# EAGLE board axiom_beta_power_board_v0.8_test (EAGLE 7.0.0), part 1 of 3
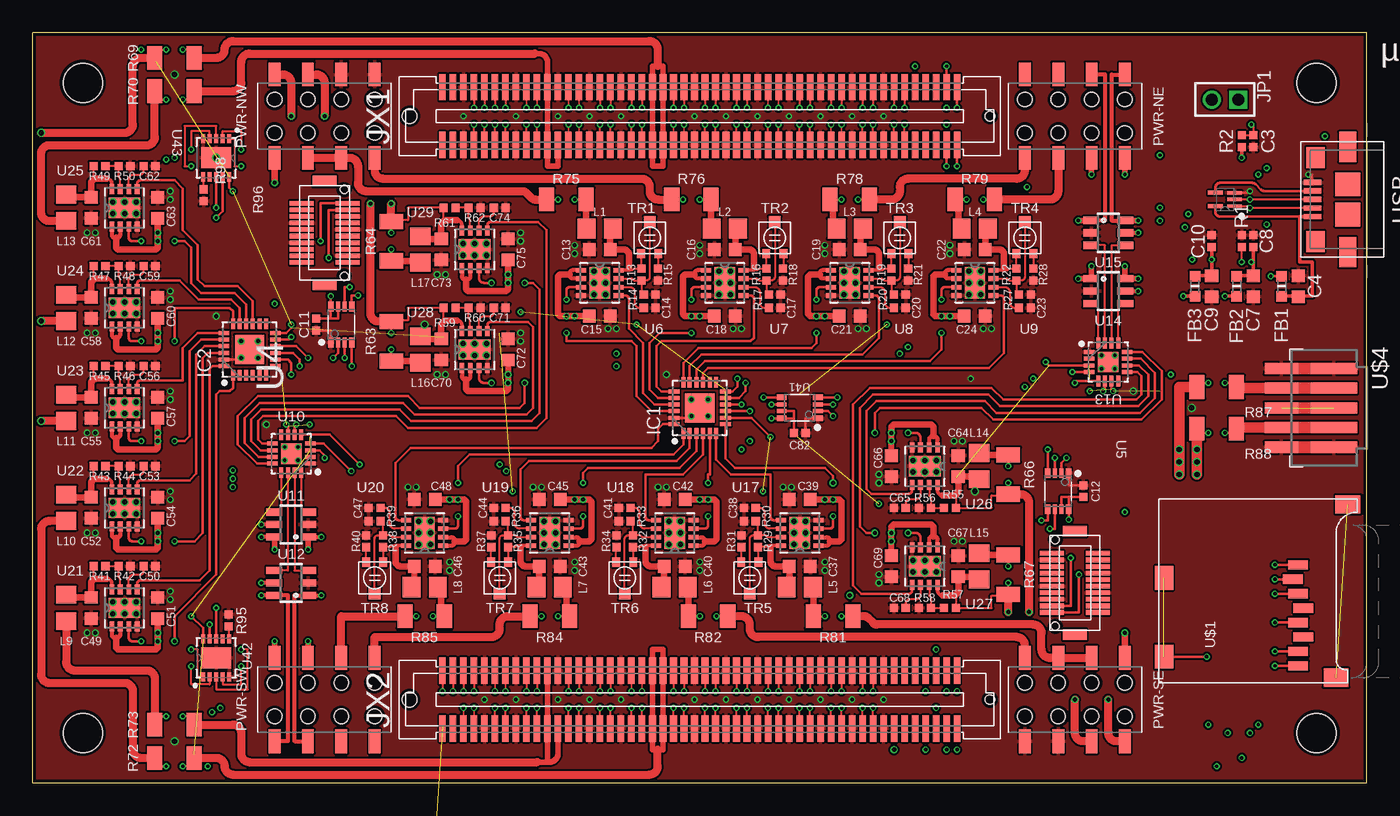
[diagram p0: board, top side]
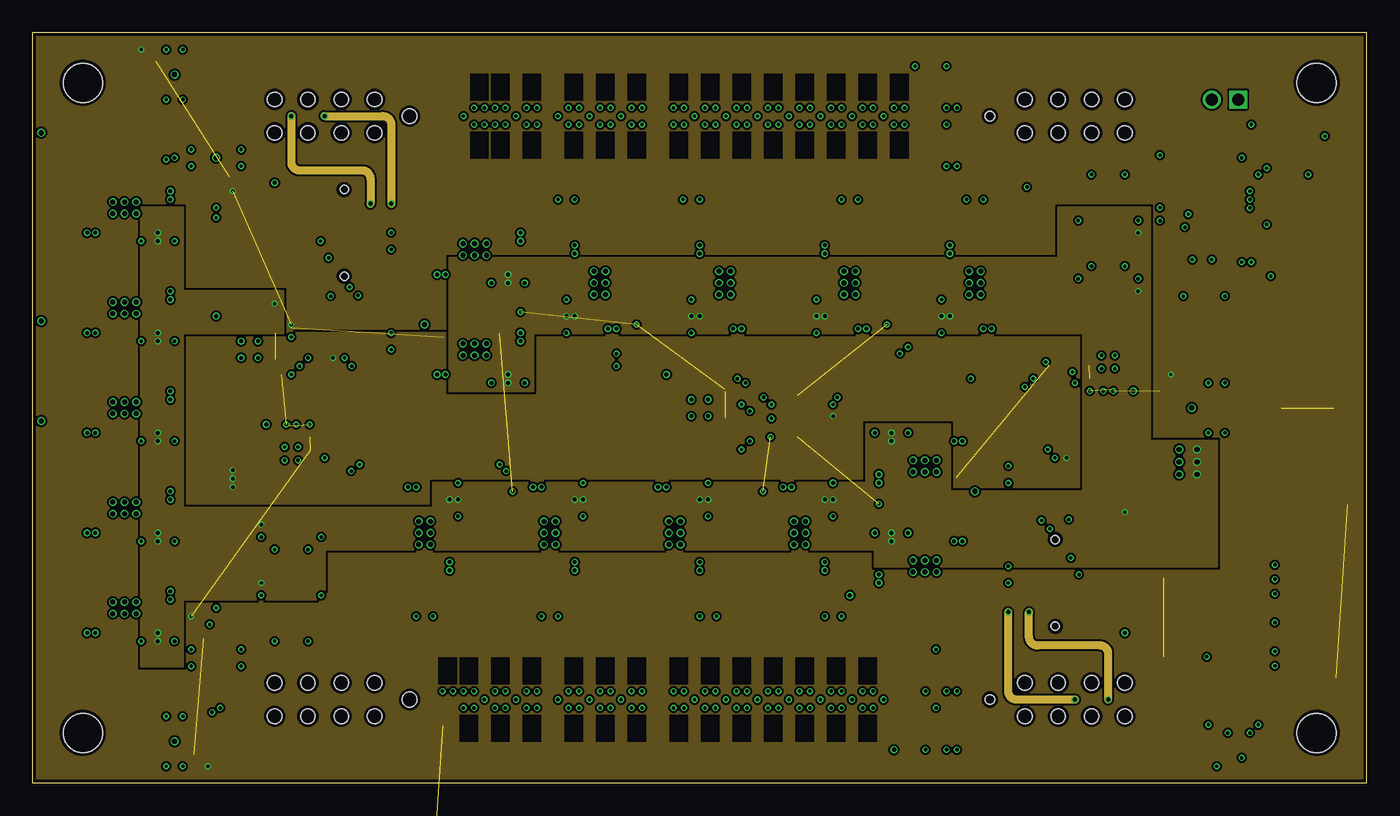
[diagram p1: board, inner layer Route2]
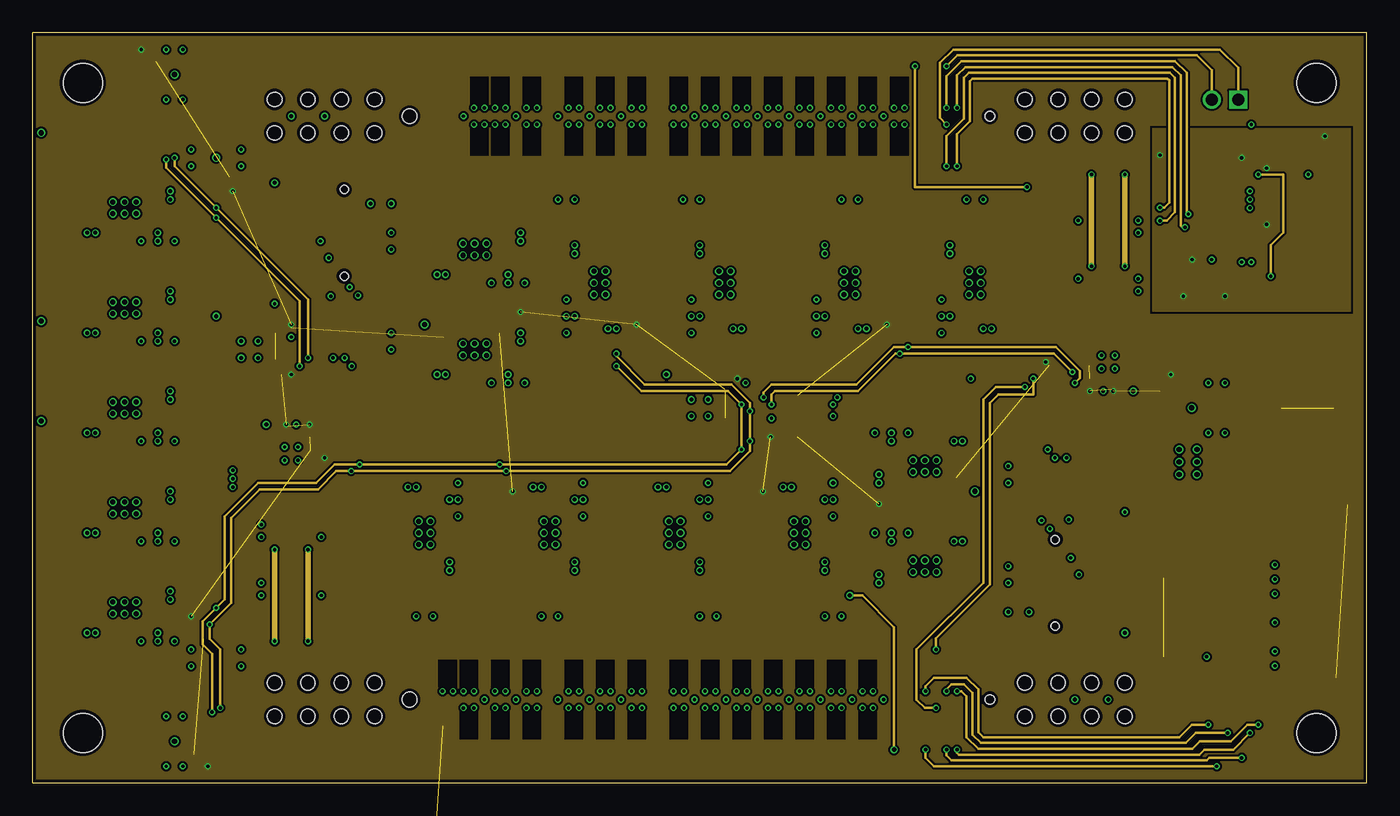
[diagram p2: board, inner layer Route15]
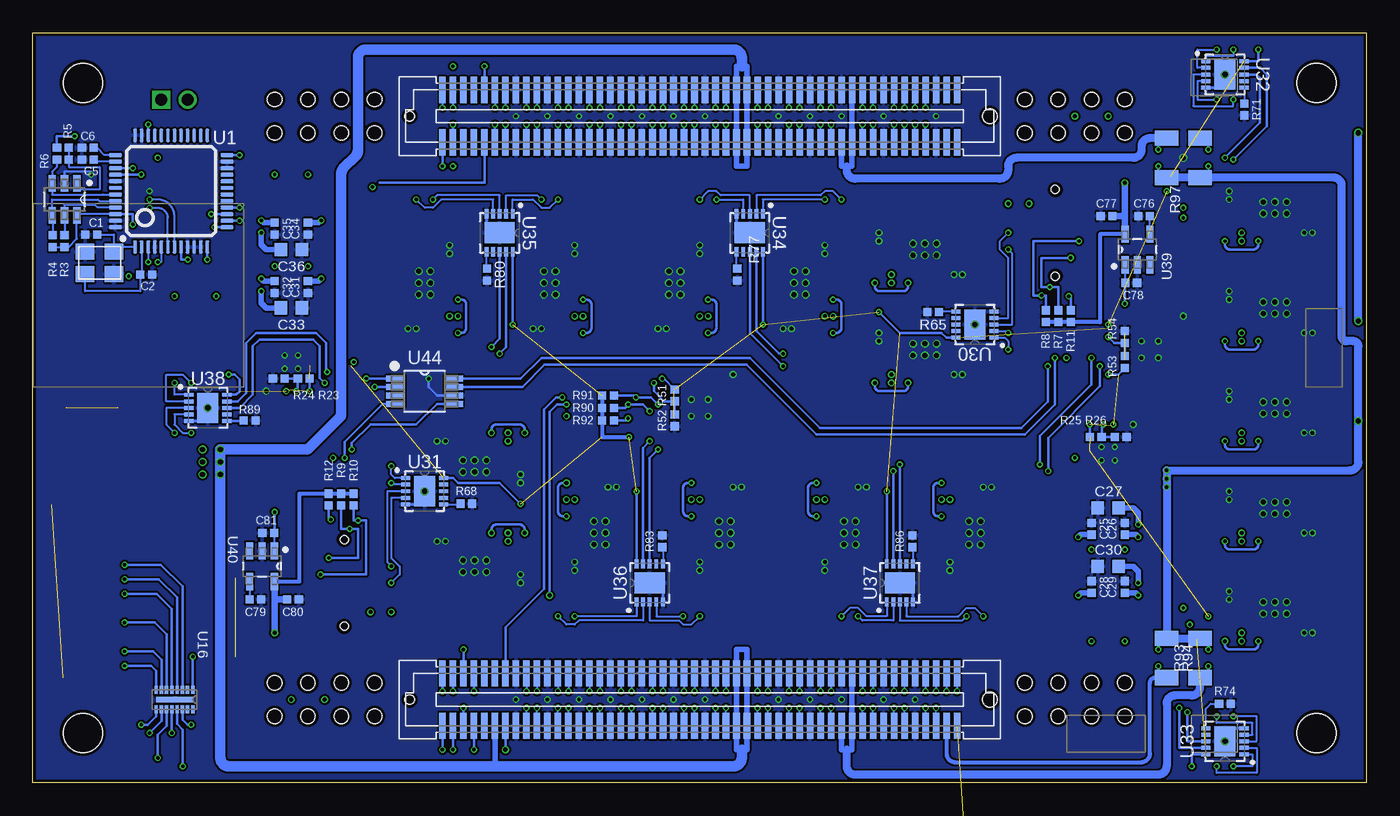
[diagram p3: board, bottom side, seen from below]

Size 101.6 x 57.15 mm. Coordinates in mm from the lower left corner, seen from the top.
Outline: 101.6,57.15 0,57.15 0,0 101.6,0 101.6,57.15
Copper layers (1*2*15*16): Top 0.035559375mm / dielectric 0.17018125mm / Route2 0.01778125mm / dielectric 47mil / Route15 0.01778125mm / dielectric 0.17018125mm / Bottom 0.035559375mm
Design rules "OSHPark-4layer-tuned *": minimum track width 5mil, minimum drill 10mil, track to track 6mil, track to pad 5mil, pad to pad 5mil, via to via 5mil, smd to smd 0mil, copper to edge 10mil, drill to drill 6mil, minimum pad ring 4mil, minimum via ring 4mil, stop-mask expansion 2mil, vias tented up to drill 16mil, thermal gap 6mil
Net classes: 1 LVDS: width 0.152 mm, drill 0.254 mm, clearance 0.152 mm
tKeepout: area 95.3,50.8 to 100.3,55.8; area 95.3,1.3 to 100.3,6.3; area 1.3,1.3 to 6.3,6.3; area 1.3,50.8 to 6.3,55.8
bKeepout: area 95.3,50.8 to 100.3,55.8; area 95.3,1.3 to 100.3,6.3; area 1.3,1.3 to 6.3,6.3; area 1.3,50.8 to 6.3,55.8
tRestrict: area 114.4,81.4 to 115.5,82.5; area 92.8,-12 to 93.9,-10.9; area -27.9,93.4 to -26.7,94.5
bRestrict: area 111.8,81.4 to 113,82.5; area 92.8,-12 to 93.9,-10.9; area -24.1,73.1 to -22.9,74.2

## Footprints (pad centres in the part's own frame; a part is rotated, then mirrored left to right if it is on the bottom)
µZ-SOCKET = smd 0.5 x 2: 1 -19.6,-24.425; 2 -19.6,-20.027; 3 -18.8,-24.425; 4 -18.8,-20.027; 5 -18,-24.425; 6 -18,-20.027; 7 -17.2,-24.425; 8 -17.2,-20.027; 9 -16.4,-24.425; 10 -16.4,-20.027; 11 -15.6,-24.425; 12 -15.6,-20.027; 13 -14.8,-24.425; 14 -14.8,-20.027; 15 -14,-24.425; 16 -14,-20.027; 17 -13.2,-24.425; 18 -13.2,-20.027; 19 -12.4,-24.425; 20 -12.4,-20.027; 21 -11.6,-24.425; 22 -11.6,-20.027; 23 -10.8,-24.425; 24 -10.8,-20.027; 25 -10,-24.425; 26 -10,-20.027; 27 -9.2,-24.425; 28 -9.2,-20.027; 29 -8.4,-24.425; 30 -8.4,-20.027; 31 -7.6,-24.425; 32 -7.6,-20.027; 33 -6.8,-24.425; 34 -6.8,-20.027; 35 -6,-24.425; 36 -6,-20.027; 37 -5.2,-24.425; 38 -5.2,-20.027; 39 -4.4,-24.425; 40 -4.4,-20.027; 41 -3.6,-24.425; 42 -3.6,-20.027; 43 -2.8,-24.425; 44 -2.8,-20.027; 45 -2,-24.425; 46 -2,-20.027; 47 -1.2,-24.425; 48 -1.2,-20.027; 49 -0.4,-24.425; 50 -0.4,-20.027; 51 0.4,-24.425; 52 0.4,-20.027; 53 1.2,-24.425; 54 1.2,-20.027; 55 2,-24.425; 56 2,-20.027; 57 2.8,-24.425; 58 2.8,-20.027; 59 3.6,-24.425; 60 3.6,-20.027; 61 4.4,-24.425; 62 4.4,-20.027; 63 5.2,-24.425; 64 5.2,-20.027; 65 6,-24.425; 66 6,-20.027; 67 6.8,-24.425; 68 6.8,-20.027; 69 7.6,-24.425; 70 7.6,-20.027; 71 8.4,-24.425; 72 8.4,-20.027; 73 9.2,-24.425; 74 9.2,-20.027; 75 10,-24.425; 76 10,-20.027; 77 10.8,-24.425; 78 10.8,-20.027; 79 11.6,-24.425; 80 11.6,-20.027; 81 12.4,-24.425; 82 12.4,-20.027; 83 13.2,-24.425; 84 13.2,-20.027; 85 14,-24.425; 86 14,-20.027; 87 14.8,-24.425; 88 14.8,-20.027; 89 15.6,-24.425; 90 15.6,-20.027; 91 16.4,-24.425; 92 16.4,-20.027; 93 17.2,-24.425; 94 17.2,-20.027; 95 18,-24.425; 96 18,-20.027; 97 18.8,-24.425; 98 18.8,-20.027; 99 19.6,-24.425; 100 19.6,-20.027; 101 -19.6,20.025; 102 -19.6,24.425; 103 -18.8,20.027; 104 -18.8,24.425; 105 -18,20.027; 106 -18,24.425; 107 -17.2,20.027; 108 -17.2,24.425; 109 -16.4,20.027; 110 -16.4,24.425; 111 -15.6,20.027; 112 -15.6,24.425; 113 -14.8,20.027; 114 -14.8,24.425; 115 -14,20.027; 116 -14,24.425; 117 -13.2,20.027; 118 -13.2,24.425; 119 -12.4,20.027; 120 -12.4,24.425; 121 -11.6,20.027; 122 -11.6,24.425; 123 -10.8,20.027; 124 -10.8,24.425; 125 -10,20.027; 126 -10,24.425; 127 -9.2,20.027; 128 -9.2,24.425; 129 -8.4,20.027; 130 -8.4,24.425; 131 -7.6,20.027; 132 -7.6,24.425; 133 -6.8,20.027; 134 -6.8,24.425; 135 -6,20.027; 136 -6,24.425; 137 -5.2,20.027; 138 -5.2,24.425; 139 -4.4,20.027; 140 -4.4,24.425; 141 -3.6,20.027; 142 -3.6,24.425; 143 -2.8,20.027; 144 -2.8,24.425; 145 -2,20.027; 146 -2,24.425; 147 -1.2,20.027; 148 -1.2,24.425; 149 -0.4,20.027; 150 -0.4,24.425; 151 0.4,20.027; 152 0.4,24.425; 153 1.2,20.027; 154 1.2,24.425; 155 2,20.027; 156 2,24.425; 157 2.8,20.027; 158 2.8,24.425; 159 3.6,20.027; 160 3.6,24.425; 161 4.4,20.027; 162 4.4,24.425; 163 5.2,20.027; 164 5.2,24.425; 165 6,20.027; 166 6,24.425; 167 6.8,20.027; 168 6.8,24.425; 169 7.6,20.027; 170 7.6,24.425; 171 8.4,20.027; 172 8.4,24.425; 173 9.2,20.027; 174 9.2,24.425; 175 10,20.027; 176 10,24.425; 177 10.8,20.027; 178 10.8,24.425; 179 11.6,20.027; 180 11.6,24.425; 181 12.4,20.027; 182 12.4,24.425; 183 13.2,20.027; 184 13.2,24.425; 185 14,20.027; 186 14,24.425; 187 14.8,20.027; 188 14.8,24.425; 189 15.6,20.027; 190 15.6,24.425; 191 16.4,20.027; 192 16.4,24.425; 193 17.2,20.027; 194 17.2,24.425; 195 18,20.027; 196 18,24.425; 197 18.8,20.027; 198 18.8,24.425; 199 19.6,20.027; 200 19.6,24.425 | hole 3: -46.99,-24.765; -46.99,24.765; 46.99,-24.765; 46.99,24.765 | hole 0.725: -22.1,-22.225; -22.1,22.225 | hole 1.125: 22.1,-22.225; 22.1,22.225
0402-B = smd 0.62 x 0.62: 1 -0.45,0; 2 0.45,0
0603-B = smd 0.95 x 1: 1 -0.8,0; 2 0.8,0
_0603MP = smd 0.8 x 0.8: 1 -0.762,0; 2 0.762,0
QFN50P400X400X80-25N = smd 0.813 x 0.305: 1 -1.956,1.245; 2 -1.956,0.762; 3 -1.956,0.254; 4 -1.956,-0.254; 5 -1.956,-0.762; 6 -1.956,-1.245; 13 1.956,-1.245; 14 1.956,-0.762; 15 1.956,-0.254; 16 1.956,0.254; 17 1.956,0.762; 18 1.956,1.245 | smd 0.305 x 0.813: 7 -1.245,-1.956; 8 -0.762,-1.956; 9 -0.254,-1.956; 10 0.254,-1.956; 11 0.762,-1.956; 12 1.245,-1.956; 19 1.245,1.956; 20 0.762,1.956; 21 0.254,1.956; 22 -0.254,1.956; 23 -0.762,1.956; 24 -1.245,1.956 | smd 2.21 x 2.21: 25 0,0
1X02M = drill 0.914 square: 1 -1,0 | drill 0.914: 2 1,0
0805-A = smd 1.35 x 1.55: 1 -1,0; 2 1,0
DF12(XX)-20DP-0.5V = smd 1.8 x 0.35: 1 -1.75,2.25; 2 1.75,2.25; 3 -1.75,1.75; 4 1.75,1.75; 5 -1.75,1.25; 6 1.75,1.25; 7 -1.75,0.75; 8 1.75,0.75; 9 -1.75,0.25; 10 1.75,0.25; 11 -1.75,-0.25; 12 1.75,-0.25; 13 -1.75,-0.75; 14 1.75,-0.75; 15 -1.75,-1.25; 16 1.75,-1.25; 17 -1.75,-1.75; 18 1.75,-1.75; 19 -1.75,-2.25; 20 1.75,-2.25 | smd 1.8 x 0.8: M1 0,3.95; M2 0,-3.95 | hole 0.625: 1.5,-3.3; 1.5,3.3
R2X04 = smd 0.9 x 1.8: 1 -3.81,3.175; 2 -3.81,-3.175; 3 -1.27,3.175; 4 -1.27,-3.175; 5 1.27,3.175; 6 1.27,-3.175; 7 3.81,3.175; 8 3.81,-3.175 | hole 1.1: -3.81,1.27; -1.27,1.27; -1.27,-1.27; -3.81,-1.27; 1.27,1.27; 1.27,-1.27; 3.81,1.27; 3.81,-1.27
ABM8G = smd 1.4 x 1.2: 1 -1.1,-0.85; 2 1.1,-0.85; 3 1.1,0.85; 4 -1.1,0.85
1206-B = smd 1.15 x 1.8: 1 -1.5,0; 2 1.5,0
TP12R = smd 1.2 x 1.2: TP 0,0
TRIM-PVZ2A = smd 0.6 x 0.7: 1 -0.65,-1.2; 3 0.65,-1.2 | smd 0.9 x 0.9: 2 0,1.2
LQFP48 = smd 0.3 x 1: 1 -2.75,-4.25; 2 -2.25,-4.25; 3 -1.75,-4.25; 4 -1.25,-4.25; 5 -0.75,-4.25; 6 -0.25,-4.25; 7 0.25,-4.25; 8 0.75,-4.25; 9 1.25,-4.25; 10 1.75,-4.25; 11 2.25,-4.25; 12 2.75,-4.25; 25 2.75,4.25; 26 2.25,4.25; 27 1.75,4.25; 28 1.25,4.25; 29 0.75,4.25; 30 0.25,4.25; 31 -0.25,4.25; 32 -0.75,4.25; 33 -1.25,4.25; 34 -1.75,4.25; 35 -2.25,4.25; 36 -2.75,4.25 | smd 1 x 0.3: 13 4.25,-2.75; 14 4.25,-2.25; 15 4.25,-1.75; 16 4.25,-1.25; 17 4.25,-0.75; 18 4.25,-0.25; 19 4.25,0.25; 20 4.25,0.75; 21 4.25,1.25; 22 4.25,1.75; 23 4.25,2.25; 24 4.25,2.75; 37 -4.25,2.75; 38 -4.25,2.25; 39 -4.25,1.75; 40 -4.25,1.25; 41 -4.25,0.75; 42 -4.25,0.25; 43 -4.25,-0.25; 44 -4.25,-0.75; 45 -4.25,-1.25; 46 -4.25,-1.75; 47 -4.25,-2.25; 48 -4.25,-2.75
SOT95P280X145-6N = smd 1.27 x 0.559: 1 -1.219,0.94; 2 -1.219,0; 3 -1.219,-0.94; 4 1.219,-0.94; 5 1.219,0; 6 1.219,0.94
SOT50P160X60-5N = smd 1.118 x 0.254: 1 -0.737,0.508; 2 -0.737,0; 3 -0.737,-0.508 | smd 1.118 x 0.305: 4 0.737,-0.508; 5 0.737,0.508
VSSOP-8 = smd 0.75 x 0.4: 1 -1.375,0.8; 4 -1.375,-0.8; 5 1.375,-0.8; 8 1.375,0.8 | smd 0.75 x 0.3: 2 -1.375,0.25; 3 -1.375,-0.25; 6 1.375,-0.25; 7 1.375,0.25
DFN65P300X300X100-9N = smd 0.762 x 0.356: 1 -1.422,0.965; 2 -1.422,0.33; 3 -1.422,-0.33; 4 -1.422,-0.965; 5 1.422,-0.965; 6 1.422,-0.33; 7 1.422,0.33; 8 1.422,0.965 | smd 1.549 x 2.413: 9 0,0
QFN50P300X300X80-17N = smd 0.813 x 0.305: 1 -1.448,0.762; 2 -1.448,0.254; 3 -1.448,-0.254; 4 -1.448,-0.762; 9 1.448,-0.762; 10 1.448,-0.254; 11 1.448,0.254; 12 1.448,0.762 | smd 0.305 x 0.813: 5 -0.762,-1.448; 6 -0.254,-1.448; 7 0.254,-1.448; 8 0.762,-1.448; 13 0.762,1.448; 14 0.254,1.448; 15 -0.254,1.448; 16 -0.762,1.448 | smd 1.549 x 1.549: EP 0,0
SOT23-6 = smd 0.55 x 1.2: 1 -0.95,-1.3; 2 0,-1.3; 3 0.95,-1.3; 4 0.95,1.3; 5 0,1.3; 6 -0.95,1.3
SON40P135X330X55-17N = smd 0.61 x 0.254: 1 -0.737,1.397; 2 -0.737,0.991; 3 -0.737,0.61; 4 -0.737,0.203; 5 -0.737,-0.203; 6 -0.737,-0.61; 7 -0.737,-0.991; 8 -0.737,-1.397; 9 0.737,-1.397; 10 0.737,-0.991; 11 0.737,-0.61; 12 0.737,-0.203; 13 0.737,0.203; 14 0.737,0.61; 15 0.737,0.991; 16 0.737,1.397 | smd 0.406 x 2.794: 17 0,0
DFN3X3_10LEAD = smd 0.7 x 0.3: 1 -1.45,1; 2 -1.45,0.5; 3 -1.45,0; 4 -1.45,-0.5; 5 -1.45,-1; 6 1.45,-1; 7 1.45,-0.5; 8 1.45,0; 9 1.45,0.5; 10 1.45,1 | smd 1.6 x 2.3: EPAD 0,0
SOT95P280X145-5N = smd 1.321 x 0.559: 1 -1.168,0.94; 2 -1.168,0; 3 -1.168,-0.94; 4 1.168,-0.94; 5 1.168,0.94
SOP65P490X110-8N = smd 1.422 x 0.457: 1 -2.21,0.965; 2 -2.21,0.33; 3 -2.21,-0.33; 4 -2.21,-0.965; 5 2.21,-0.965; 6 2.21,-0.33; 7 2.21,0.33; 8 2.21,0.965
TF-MICRO-SD_PP2 = smd 0.7 x 1.5: 1 9,-10.64; 2 7.9,-10.24; 3 6.8,-10.64; 4 5.7,-11.04; 5 4.6,-10.64; 6 3.5,-11.04; 7 2.4,-10.64; 8 1.3,-10.64 | smd 1.8 x 1.4: CD1 2,-0.44; CD2 8,-0.44 | smd 1.4 x 1.9: MT1 0.4,-13.54; MT2 13.6,-14.44
PICO-SPOX-5 = smd 0.85 x 2.55: 1 -3,-6.5; 2 -1.5,-6.5; 3 0,-6.5; 4 1.5,-6.5; 5 3,-6.5 | smd 0.85 x 3.55: 1A -3,-2.5; 2A -1.5,-2.5; 3A 0,-2.5; 4A 1.5,-2.5; 5A 3,-2.5
MICRO-AB-H-SMT = smd 0.4 x 1.35: 1 -1.3,4.125; 2 -0.65,4.125; 3 0,4.125; 4 0.65,4.125; 5 1.3,4.125 | smd 2.3 x 1.3: Z1 -4,1.45; Z4 4,1.45 | smd 1.8 x 1.9: Z2 -1.15,1.45; Z3 1.15,1.45 | smd 1.6 x 1.4: Z5 -3.2,3.9; Z6 3.2,3.9
µZ-CONONLY = smd 0.5 x 2: 1 19.6,-24.226; 2 19.6,-20.226; 3 18.8,-24.226; 4 18.8,-20.226; 5 18,-24.226; 6 18,-20.226; 7 17.2,-24.226; 8 17.2,-20.226; 9 16.4,-24.226; 10 16.4,-20.226; 11 15.6,-24.226; 12 15.6,-20.226; 13 14.8,-24.226; 14 14.8,-20.226; 15 14,-24.226; 16 14,-20.226; 17 13.2,-24.226; 18 13.2,-20.226; 19 12.4,-24.226; 20 12.4,-20.226; 21 11.6,-24.226; 22 11.6,-20.226; 23 10.8,-24.226; 24 10.8,-20.226; 25 10,-24.226; 26 10,-20.226; 27 9.2,-24.226; 28 9.2,-20.226; 29 8.4,-24.226; 30 8.4,-20.226; 31 7.6,-24.226; 32 7.6,-20.226; 33 6.8,-24.226; 34 6.8,-20.226; 35 6,-24.226; 36 6,-20.226; 37 5.2,-24.226; 38 5.2,-20.226; 39 4.4,-24.226; 40 4.4,-20.226; 41 3.6,-24.226; 42 3.6,-20.226; 43 2.8,-24.226; 44 2.8,-20.226; 45 2,-24.226; 46 2,-20.226; 47 1.2,-24.226; 48 1.2,-20.226; 49 0.4,-24.226; 50 0.4,-20.226; 51 -0.4,-24.226; 52 -0.4,-20.226; 53 -1.2,-24.226; 54 -1.2,-20.226; 55 -2,-24.226; 56 -2,-20.226; 57 -2.8,-24.226; 58 -2.8,-20.226; 59 -3.6,-24.226; 60 -3.6,-20.226; 61 -4.4,-24.226; 62 -4.4,-20.226; 63 -5.2,-24.226; 64 -5.2,-20.226; 65 -6,-24.226; 66 -6,-20.226; 67 -6.8,-24.226; 68 -6.8,-20.226; 69 -7.6,-24.226; 70 -7.6,-20.226; 71 -8.4,-24.226; 72 -8.4,-20.226; 73 -9.2,-24.226; 74 -9.2,-20.226; 75 -10,-24.226; 76 -10,-20.226; 77 -10.8,-24.226; 78 -10.8,-20.226; 79 -11.6,-24.226; 80 -11.6,-20.226; 81 -12.4,-24.226; 82 -12.4,-20.226; 83 -13.2,-24.226; 84 -13.2,-20.226; 85 -14,-24.226; 86 -14,-20.226; 87 -14.8,-24.226; 88 -14.8,-20.226; 89 -15.6,-24.226; 90 -15.6,-20.226; 91 -16.4,-24.226; 92 -16.4,-20.226; 93 -17.2,-24.226; 94 -17.2,-20.226; 95 -18,-24.226; 96 -18,-20.226; 97 -18.8,-24.226; 98 -18.8,-20.226; 99 -19.6,-24.226; 100 -19.6,-20.226; 101 19.6,20.226; 102 19.6,24.226; 103 18.8,20.226; 104 18.8,24.226; 105 18,20.226; 106 18,24.226; 107 17.2,20.226; 108 17.2,24.226; 109 16.4,20.226; 110 16.4,24.226; 111 15.6,20.226; 112 15.6,24.226; 113 14.8,20.226; 114 14.8,24.226; 115 14,20.226; 116 14,24.226; 117 13.2,20.226; 118 13.2,24.226; 119 12.4,20.226; 120 12.4,24.226; 121 11.6,20.226; 122 11.6,24.226; 123 10.8,20.226; 124 10.8,24.226; 125 10,20.226; 126 10,24.226; 127 9.2,20.226; 128 9.2,24.226; 129 8.4,20.226; 130 8.4,24.226; 131 7.6,20.226; 132 7.6,24.226; 133 6.8,20.226; 134 6.8,24.226; 135 6,20.226; 136 6,24.226; 137 5.2,20.226; 138 5.2,24.226; 139 4.4,20.226; 140 4.4,24.226; 141 3.6,20.226; 142 3.6,24.226; 143 2.8,20.226; 144 2.8,24.226; 145 2,20.226; 146 2,24.226; 147 1.2,20.226; 148 1.2,24.226; 149 0.4,20.226; 150 0.4,24.226; 151 -0.4,20.226; 152 -0.4,24.226; 153 -1.2,20.226; 154 -1.2,24.226; 155 -2,20.226; 156 -2,24.226; 157 -2.8,20.226; 158 -2.8,24.226; 159 -3.6,20.226; 160 -3.6,24.226; 161 -4.4,20.226; 162 -4.4,24.226; 163 -5.2,20.226; 164 -5.2,24.226; 165 -6,20.226; 166 -6,24.226; 167 -6.8,20.226; 168 -6.8,24.226; 169 -7.6,20.226; 170 -7.6,24.226; 171 -8.4,20.226; 172 -8.4,24.226; 173 -9.2,20.226; 174 -9.2,24.226; 175 -10,20.226; 176 -10,24.226; 177 -10.8,20.226; 178 -10.8,24.226; 179 -11.6,20.226; 180 -11.6,24.226; 181 -12.4,20.226; 182 -12.4,24.226; 183 -13.2,20.226; 184 -13.2,24.226; 185 -14,20.226; 186 -14,24.226; 187 -14.8,20.226; 188 -14.8,24.226; 189 -15.6,20.226; 190 -15.6,24.226; 191 -16.4,20.226; 192 -16.4,24.226; 193 -17.2,20.226; 194 -17.2,24.226; 195 -18,20.226; 196 -18,24.226; 197 -18.8,20.226; 198 -18.8,24.226; 199 -19.6,20.226; 200 -19.6,24.226 | hole 1.125: -22.1,-22.225; -22.1,22.225 | hole 0.725: 22.1,-22.225; 22.1,22.225

## Placement (x,y rotation side)
BETA  µZ-FCI-SOCKET  [µZ-SOCKET]  50.8,28.57 180 top
C1  [0402-B]  97.16,41.78 180 bottom
C2  [0402-B]  92.96,38.73 0 bottom
C3  10n  [0402-B]  92.96,48.89 270 top
C4  100n  [0603-B]  96.39,37.85 90 top
C5  100n  [0402-B]  97.41,47.5 180 bottom
C6  100n  [0402-B]  97.41,48.39 180 bottom
C7  4µ7  [0603-B]  92.96,37.85 270 top
C8  100n  [0402-B]  92.96,41.27 90 top
C9  4µ7  [0603-B]  89.79,37.85 270 top
C10  100n  [0402-B]  89.79,41.27 90 top
C11  [0402-B]  21.59,34.92 270 top
C12  [0402-B]  80.01,22.23 90 top
C13  [0603-B]  43.18,40.64 180 top
C14  [0402-B]  46.99,36.2 0 top
C15  [0603-B]  43.18,35.56 0 top
C16  [0603-B]  52.7,40.64 180 top
C17  [0402-B]  56.52,36.2 0 top
C18  [0603-B]  52.7,35.56 0 top
C19  [0603-B]  62.23,40.64 180 top
C20  [0402-B]  66.04,36.2 0 top
C21  [0603-B]  62.23,35.56 0 top
C22  [0603-B]  71.75,40.64 180 top
C23  [0402-B]  75.56,36.2 0 top
C24  [0603-B]  71.75,35.56 0 top
C25  1µ  [0402-B]  20.95,19.37 90 bottom
C26  1µ  [0402-B]  18.41,19.37 90 bottom
C27  1µ  [0603-B]  19.68,20.95 180 bottom
C28  1µ  [0402-B]  20.95,14.92 90 bottom
C29  1µ  [0402-B]  18.41,14.92 90 bottom
C30  1µ  [0603-B]  19.68,16.51 180 bottom
C31  1µ  [0402-B]  80.64,37.78 270 bottom
C32  1µ  [0402-B]  83.19,37.78 270 bottom
C33  1µ  [0603-B]  81.91,36.2 0 bottom
C34  1µ  [0402-B]  80.64,42.23 270 bottom
C35  1µ  [0402-B]  83.19,42.23 270 bottom
C36  1µ  [0603-B]  81.91,40.64 0 bottom
C37  [0603-B]  58.42,16.51 0 top
C38  [0402-B]  54.61,20.95 180 top
C39  [0603-B]  58.42,21.59 180 top
C40  [0603-B]  48.89,16.51 0 top
C41  [0402-B]  45.08,20.95 180 top
C42  [0603-B]  48.89,21.59 180 top
C43  [0603-B]  39.37,16.51 0 top
C44  [0402-B]  35.56,20.95 180 top
C45  [0603-B]  39.37,21.59 180 top
C46  [0603-B]  29.84,16.51 0 top
C47  [0402-B]  26.03,20.95 180 top
C48  [0603-B]  29.84,21.59 180 top
C49  [0603-B]  4.45,13.33 270 top
C50  [0402-B]  8.89,16.51 0 top
C51  [0603-B]  9.52,13.33 90 top
C52  [0603-B]  4.45,20.95 270 top
C53  [0402-B]  8.89,24.13 0 top
C54  [0603-B]  9.52,20.95 90 top
C55  [0603-B]  4.45,28.57 270 top
C56  [0402-B]  8.89,31.75 0 top
C57  [0603-B]  9.52,28.57 90 top
C58  [0603-B]  4.45,36.2 270 top
C59  [0402-B]  8.89,39.37 0 top
C60  [0603-B]  9.52,36.2 90 top
C61  [0603-B]  4.45,43.81 270 top
C62  [0402-B]  8.89,46.99 0 top
C63  [0603-B]  9.52,43.81 90 top
C64  [0603-B]  70.48,24.13 90 top
C65  [0402-B]  66.04,20.95 180 top
C66  [0603-B]  65.41,24.13 270 top
C67  [0603-B]  70.48,16.51 90 top
C68  [0402-B]  66.04,13.33 180 top
C69  [0603-B]  65.41,16.51 270 top
C70  [0603-B]  31.11,33.02 270 top
C71  [0402-B]  35.56,36.2 0 top
C72  [0603-B]  36.19,33.02 90 top
C73  [0603-B]  31.11,40.64 270 top
C74  [0402-B]  35.56,43.81 0 top
C75  [0603-B]  36.19,40.64 90 top
C76  [0402-B]  16.95,43.18 180 bottom
C77  [0402-B]  19.81,43.18 180 bottom
C78  [0402-B]  17.93,38.1 0 bottom
C79  [0402-B]  84.65,13.97 0 bottom
C80  [0402-B]  81.79,13.97 0 bottom
C81  [0402-B]  83.67,19.05 180 bottom
C82  [0402-B]  58.42,26.67 0 top
FB1  600R  [_0603MP]  95.12,37.85 90 top
FB2  600R  [_0603MP]  91.69,37.85 90 top
FB3  600R  [_0603MP]  88.52,37.85 90 top
IC1  MCP23018QFN  [QFN50P400X400X80-25N]  50.8,28.57 90 top
IC2  MCP23018QFN  [QFN50P400X400X80-25N]  16.51,33.02 90 top
JP1  [1X02M]  90.81,52.07 180 top
L1  [0805-A]  43.18,42.23 180 top
L2  [0805-A]  52.7,42.23 180 top
L3  [0805-A]  62.23,42.23 180 top
L4  [0805-A]  71.75,42.23 180 top
L5  [0805-A]  58.42,14.92 0 top
L6  [0805-A]  48.89,14.92 0 top
L7  [0805-A]  39.37,14.92 0 top
L8  [0805-A]  29.84,14.92 0 top
L9  [0805-A]  2.54,13.33 270 top
L10  [0805-A]  2.54,20.95 270 top
L11  [0805-A]  2.54,28.57 270 top
L12  [0805-A]  2.54,36.2 270 top
L13  [0805-A]  2.54,43.81 270 top
L14  [0805-A]  72.07,24.13 90 top
L15  [0805-A]  72.07,16.51 90 top
L16  [0805-A]  29.53,33.02 270 top
L17  [0805-A]  29.53,40.64 270 top
LOGO1  OSHW_LOGO_FILLX0100-NT  [OSHW_FILLX100_NOTEXT]  147.95,11.81 90 top  (outside the outline)
PB-NW  DF12(XX)-20DP-0.5V  [DF12(XX)-20DP-0.5V]  22.22,41.91 0 top
PB-SE  DF12(XX)-20DP-0.5V  [DF12(XX)-20DP-0.5V]  79.38,15.24 180 top
PWR-NE  PINRC-2X04  [R2X04]  79.38,50.8 180 top
PWR-NW  PINRC-2X04  [R2X04]  22.22,50.8 0 top
PWR-SE  PINRC-2X04  [R2X04]  79.38,6.35 180 top
PWR-SW  PINRC-2X04  [R2X04]  22.22,6.35 0 top
Q1  SMD-4P-2G-3.2X2.5  [ABM8G]  96.52,39.62 180 bottom
R1  12k  [0402-B]  92.07,41.27 270 top
R2  10k  [0402-B]  92.07,48.89 270 top
R3  10k  [0402-B]  99.19,41.27 270 bottom
R4  10k  [0402-B]  100.08,41.27 270 bottom
R5  10k  [0402-B]  99.31,48.39 180 bottom
R6  2k  [0402-B]  99.31,47.5 180 bottom
R7  [0402-B]  23.49,35.56 90 bottom
R8  [0402-B]  24.45,35.56 90 bottom
R9  [0402-B]  78.1,21.59 270 bottom
R10  [0402-B]  77.15,21.59 270 bottom
R11  [0402-B]  22.54,35.56 90 bottom
R12  [0402-B]  79.06,21.59 270 bottom
R13  [0402-B]  46.35,38.73 270 top
R14  [0402-B]  46.99,37.21 0 top
R15  [0402-B]  47.62,38.73 270 top
R16  [0402-B]  55.88,38.73 270 top
R17  [0402-B]  56.52,37.21 0 top
R18  [0402-B]  57.15,38.73 270 top
R19  [0402-B]  65.41,38.73 270 top
R20  [0402-B]  66.04,37.21 0 top
R21  [0402-B]  66.67,38.73 270 top
R22  [0402-B]  74.93,38.73 270 top
R23  [0402-B]  80.96,30.8 180 bottom
R24  [0402-B]  82.87,30.8 180 bottom
R25  [0402-B]  20.64,26.35 0 bottom
R26  [0402-B]  18.73,26.35 0 bottom
R27  [0402-B]  75.56,37.21 0 top
R28  [0402-B]  76.2,38.73 270 top
R29  [0402-B]  55.24,18.41 90 top
R30  [0402-B]  54.61,19.94 180 top
R31  [0402-B]  53.97,18.41 90 top
R32  [0402-B]  45.72,18.41 90 top
R33  [0402-B]  45.08,19.94 180 top
R34  [0402-B]  44.45,18.41 90 top
R35  [0402-B]  36.19,18.41 90 top
R36  [0402-B]  35.56,19.94 180 top
R37  [0402-B]  34.92,18.41 90 top
R38  [0402-B]  26.67,18.41 90 top
R39  [0402-B]  26.03,19.94 180 top
R40  [0402-B]  25.4,18.41 90 top
R41  [0402-B]  5.08,16.51 0 top
R42  [0402-B]  6.98,16.51 0 top
R43  [0402-B]  5.08,24.13 0 top
R44  [0402-B]  6.98,24.13 0 top
R45  [0402-B]  5.08,31.75 0 top
R46  [0402-B]  6.98,31.75 0 top
R47  [0402-B]  5.08,39.37 0 top
R48  [0402-B]  6.98,39.37 0 top
R49  [0402-B]  5.08,46.99 0 top
R50  [0402-B]  6.98,46.99 0 top
R51  [0402-B]  52.7,29.53 270 bottom
R52  [0402-B]  52.7,27.62 270 bottom
R53  [0402-B]  18.41,32.07 90 bottom
R54  [0402-B]  18.41,33.97 90 bottom
R55  [0402-B]  69.85,20.95 180 top
R56  [0402-B]  67.94,20.95 180 top
R57  [0402-B]  69.85,13.33 180 top
R58  [0402-B]  67.94,13.33 180 top
R59  [0402-B]  31.75,36.2 0 top
R60  [0402-B]  33.66,36.2 0 top
R61  [0402-B]  31.75,43.81 0 top
R62  [0402-B]  33.66,43.81 0 top
R63  [1206-B]  27.3,33.66 90 top
R64  [1206-B]  27.3,41.27 90 top
R65  [0402-B]  33.02,35.88 180 bottom
R66  [1206-B]  74.3,23.49 270 top
R67  [1206-B]  74.3,15.88 270 top
R68  [0402-B]  68.58,21.27 0 bottom
R69  [1206-B]  10.79,55.25 0 top
R70  [1206-B]  10.79,52.7 0 top
R71  [0402-B]  9.33,51.31 270 bottom
R72  [1206-B]  10.79,1.9 0 top
R73  [1206-B]  10.79,4.45 0 top
R74  [0402-B]  10.79,6.03 0 bottom
R75  [1206-B]  40.64,44.45 180 top
R76  [1206-B]  50.16,44.45 180 top
R77  [0402-B]  47.94,38.73 270 bottom
R78  [1206-B]  62.23,44.45 0 top
R79  [1206-B]  71.75,44.45 0 top
R80  [0402-B]  66.99,38.73 270 bottom
R81  [1206-B]  60.96,12.7 0 top
R82  [1206-B]  51.43,12.7 0 top
R83  [0402-B]  53.66,18.41 90 bottom
R84  [1206-B]  39.37,12.7 180 top
R85  [1206-B]  29.84,12.7 180 top
R86  [0402-B]  34.61,18.41 90 bottom
R87  [1206-B]  90.17,30.16 180 top
R88  [1206-B]  90.17,26.99 180 top
R89  [0402-B]  85.09,27.62 0 bottom
R90  [0402-B]  57.78,28.57 0 bottom
R91  [0402-B]  57.78,29.53 0 bottom
R92  [0402-B]  57.78,27.62 0 bottom
R93  [1206-B]  12.7,9.52 270 bottom
R94  [1206-B]  15.24,9.52 270 bottom
R95  [0402-B]  14.92,12.38 90 top
R96  [1206-B]  15.24,47.62 90 bottom
R97  [1206-B]  12.7,47.62 90 bottom
R98  [0402-B]  13.02,44.77 270 top
TP5  TPTP12R  [TP12R]  30.48,-6.35 90 top  (outside the outline)
TR1  PVZ2A  [TRIM-PVZ2A]  46.99,41.53 0 top
TR2  PVZ2A  [TRIM-PVZ2A]  56.52,41.53 0 top
TR3  PVZ2A  [TRIM-PVZ2A]  66.04,41.53 0 top
TR4  PVZ2A  [TRIM-PVZ2A]  75.56,41.53 0 top
TR5  PVZ2A  [TRIM-PVZ2A]  54.61,15.62 180 top
TR6  PVZ2A  [TRIM-PVZ2A]  45.08,15.62 180 top
TR7  PVZ2A  [TRIM-PVZ2A]  35.56,15.62 180 top
TR8  PVZ2A  [TRIM-PVZ2A]  26.03,15.62 180 top
U1  FT232H  [LQFP48]  91.06,45.09 0 bottom
U2  93LC46BT-I/OT  [SOT95P280X145-6N]  99.19,44.45 270 bottom
U3  TPD3E001DRLR  [SOT50P160X60-5N]  90.81,44.45 180 top
U4  GTL2002DC  [VSSOP-8]  23.49,34.92 90 top
U5  GTL2002DC  [VSSOP-8]  78.1,22.23 270 top
U6  MCP1727-ADJE/MF  [DFN65P300X300X100-9N]  43.18,38.1 0 top
U7  MCP1727-ADJE/MF  [DFN65P300X300X100-9N]  52.7,38.1 0 top
U8  MCP1727-ADJE/MF  [DFN65P300X300X100-9N]  62.23,38.1 0 top
U9  MCP1727-ADJE/MF  [DFN65P300X300X100-9N]  71.75,38.1 0 top
U10  MCP23009-E/MG  [QFN50P300X300X80-17N]  19.68,25.08 180 top
U11  [SOT23-6]  19.68,19.68 90 top
U12  [SOT23-6]  19.68,15.24 90 top
U13  MCP23009-E/MG  [QFN50P300X300X80-17N]  81.91,32.07 0 top
U14  [SOT23-6]  81.91,37.47 270 top
U15  [SOT23-6]  81.91,41.91 270 top
U16  IP4251CZ16-8-TTL  [SON40P135X330X55-17N]  90.81,6.35 270 bottom
U17  MCP1727-ADJE/MF  [DFN65P300X300X100-9N]  58.42,19.05 180 top
U18  MCP1727-ADJE/MF  [DFN65P300X300X100-9N]  48.89,19.05 180 top
U19  MCP1727-ADJE/MF  [DFN65P300X300X100-9N]  39.37,19.05 180 top
U20  MCP1727-ADJE/MF  [DFN65P300X300X100-9N]  29.84,19.05 180 top
U21  MCP1727-ADJE/MF  [DFN65P300X300X100-9N]  6.98,13.33 90 top
U22  MCP1727-ADJE/MF  [DFN65P300X300X100-9N]  6.98,20.95 90 top
U23  MCP1727-ADJE/MF  [DFN65P300X300X100-9N]  6.98,28.57 90 top
U24  MCP1727-ADJE/MF  [DFN65P300X300X100-9N]  6.98,36.2 90 top
U25  MCP1727-ADJE/MF  [DFN65P300X300X100-9N]  6.98,43.81 90 top
U26  MCP1727-ADJE/MF  [DFN65P300X300X100-9N]  67.94,24.13 270 top
U27  MCP1727-ADJE/MF  [DFN65P300X300X100-9N]  67.94,16.51 270 top
U28  MCP1727-ADJE/MF  [DFN65P300X300X100-9N]  33.66,33.02 90 top
U29  MCP1727-ADJE/MF  [DFN65P300X300X100-9N]  33.66,40.64 90 top
U30  PAC1720  [DFN3X3_10LEAD]  29.84,34.92 180 bottom
U31  PAC1720  [DFN3X3_10LEAD]  71.75,22.23 0 bottom
U32  PAC1720  [DFN3X3_10LEAD]  10.79,53.97 0 bottom
U33  PAC1720  [DFN3X3_10LEAD]  10.79,3.18 180 bottom
U34  PAC1720  [DFN3X3_10LEAD]  46.99,41.91 270 bottom
U35  PAC1720  [DFN3X3_10LEAD]  66.04,41.91 270 bottom
U36  PAC1720  [DFN3X3_10LEAD]  54.61,15.24 90 bottom
U37  PAC1720  [DFN3X3_10LEAD]  35.56,15.24 90 bottom
U38  PAC1720  [DFN3X3_10LEAD]  88.27,28.57 0 bottom
U39  SPX3819M5-L  [SOT95P280X145-5N]  17.46,40.64 90 bottom
U40  SPX3819M5-L  [SOT95P280X145-5N]  84.14,16.51 270 bottom
U41  GTL2002DC  [VSSOP-8]  58.42,28.57 180 top
U42  PAC1720  [DFN3X3_10LEAD]  13.97,9.52 90 top
U43  PAC1720  [DFN3X3_10LEAD]  13.97,47.62 270 top
U44  PCA9540BDP  [SOP65P490X110-8N]  71.75,29.84 0 bottom
U$1  MICRO-SD-2CD  [TF-MICRO-SD_PP2]  85.72,7.62 90 top
U$4  PICO-SPOX-5  [PICO-SPOX-5]  101.6,28.57 270 top
USB  5_USB_3S  [MICRO-AB-H-SMT]  101.6,44.45 90 top
ZED  µZ-FCI-CONONLY  [µZ-CONONLY]  50.8,28.57 180 bottom

## Library data of the parts
BETA ZED = microzed
C1-C82 L1-L17 R1-R98 = generic-rcl
FB1-FB3 = microbuilder
IC1 IC2 = microchip-exp
JP1 = pinhead-2
LOGO1 = ohw-logo
PB-NW PB-SE = df12
PWR-NE PWR-NW PWR-SE PWR-SW = pincon
Q1 = xtal
TP5 = testpad
TR1-TR8 = paul
U1 = ft232h
U2 = 93lc46; MPN: 93LC46BT-I/OT; OC_FARNELL: 1556164; OC_NEWARK: 75M3689; PACKAGE: SOT-6; SUPPLIER: Microchip
U3 = esd; MPN: TPD3E001DRLR; OC_FARNELL: 1603422; OC_NEWARK: 41M5842; PACKAGE: SOT-5; SUPPLIER: Texas Instruments
U4 U5 U41 = gtl2002
U6-U9 U17-U29 = mcp1727; MPN: MCP1727-ADJE/MF; OC_FARNELL: 1851979; OC_NEWARK: 74K5374; PACKAGE: DFN-8; SUPPLIER: Microchip
U10 U13 = mcp23009
U11 U12 U14 U15 = ldo
U16 = emifil; MPN: IP4251CZ16-8-TTL; OC_FARNELL: 1972684; OC_NEWARK: 58T9585; PACKAGE: SON-16; SUPPLIER: NXP
U30-U38 U42 U43 = pac1720
U39 U40 = spx3819; MPN: SPX3819M5-L; OC_FARNELL: 1831948; OC_NEWARK: 23R9689; PACKAGE: SOT-23-5; SUPPLIER: EXAR
U44 = pca9540; MPN: PCA9540BDP; OC_FARNELL: 2212116; OC_NEWARK: 55W4318; PACKAGE: TSSOP8; SUPPLIER: NXP
U$1 = micro-sd
U$4 = pico-spox
USB = usb; TE: 1981584

## Nets
A_SCL: PB-NW.2 R8.2 U4.5
A_SCL': U4.4 U44.8
A_SDA: PB-NW.4 R7.2 U4.6
A_SDA': U4.3 U44.7
AB_SCL: ZED.10
AB_SDA: ZED.9
B_SCL: PB-SE.2 R10.2 U5.5
B_SCL': U5.4 U44.5
B_SDA: PB-SE.4 R9.2 U5.6
B_SDA': U5.3 U44.4
BANK13_00_N [LVDS]: BETA.87 ZED.87
BANK13_00_P [LVDS]: BETA.89 ZED.89
BANK13_01_N [LVDS]: BETA.90 ZED.90
BANK13_01_P [LVDS]: BETA.88 ZED.88
BANK13_02_N [LVDS]: BETA.91 ZED.91
BANK13_02_P [LVDS]: BETA.93 ZED.93
BANK13_03_N [LVDS]: BETA.92 ZED.92
BANK13_03_P [LVDS]: BETA.94 ZED.94
BANK13_04_N [LVDS]: BETA.193 ZED.193
BANK13_04_P [LVDS]: BETA.195 ZED.195
BANK13_05_N: BETA.196 ZED.196
BANK13_05_P: BETA.194 ZED.194
BANK13_06_N [LVDS]: BETA.199 ZED.199
BANK13_06_P [LVDS]: BETA.197 ZED.197
BANK13_SE_0: TP5.TP ZED.200
BETA_5V: R88.1 U38.3 U$4.4 U$4.4A
BETA_5V': C15.1 C18.1 C21.1 C24.1 C27.1 C30.1 C33.1 C36.1 C39.1 C42.1 C45.1 C48.1 C51.1 C54.1 C57.1 C60.1 C63.1 C66.1 C69.1 C72.1 C75.1 C78.1 C81.1 R88.2 U6.1 U6.2 U7.1 U7.2 U8.1 U8.2 U9.1 U9.2 U11.5 U12.5 U14.5 U15.5 U17.1 U17.2 U18.1 U18.2 U19.1 U19.2 U20.1 U20.2 U21.1 U21.2 U22.1 U22.2 U23.1 U23.2 U24.1 U24.2 U25.1 U25.2 U26.1 U26.2 U27.1 U27.2 U28.1 U28.2 U29.1 U29.2 U38.4 U39.1 U40.1
BETA_TDO: BETA.3 JP1.2
CD: U16.1 U$1.CD1 U$1.CD2
CLK: U16.6 U$1.5
CMD: U16.5 U$1.3
DAT0: U16.7 U$1.7
DAT1: U16.8 U$1.8
DAT2: U16.3 U$1.1
DAT3: U16.4 U$1.2
E_I2C_V: C34.1 PWR-NE.4 U15.1
E_SDI_V: C35.1 PWR-NE.2 U15.6
E_VE: PWR-SE.4 PWR-SE.6 R81.2 U36.2
E_VE_CV: PB-NW.8
E_VE_OV: PB-NW.9
E_VE_UV: PB-NW.11
EE_CLK1: R4.1 U1.44 U2.4
EE_CS1: R3.1 U1.45 U2.5
EE_DATA1: R6.2 U1.43 U2.3
EN1: U10.13 U11.4
EN1B: U13.13 U14.4
EN2: U10.14 U12.4
EN2B: U13.14 U15.4
EN3: U10.16 U11.3
EN3B: U13.16 U14.3
EN4: U10.15 U12.3
EN4B: U13.15 U15.3
FTDI_D_N: U1.6 U3.1 USB.2
FTDI_D_P: U1.7 U3.2 USB.3
FTDI_TCK: BETA.1 U1.13 ZED.1
FTDI_TDI: BETA.4 U1.14
FTDI_TDO: U1.15 ZED.3
FTDI_TMS: BETA.2 U1.16 ZED.2
GND: BETA.15 BETA.16 BETA.21 BETA.22 BETA.27 BETA.28 BETA.33 BETA.34 BETA.39 BETA.40 BETA.45 BETA.46 BETA.51 BETA.52 BETA.65 BETA.66 BETA.71 BETA.72 BETA.77 BETA.85 BETA.86 BETA.95 BETA.96 BETA.115 BETA.116 BETA.121 BETA.122 BETA.127 BETA.128 BETA.133 BETA.134 BETA.139 BETA.140 BETA.145 BETA.146 BETA.151 BETA.152 BETA.165 BETA.166 BETA.171 BETA.172 BETA.177 BETA.185 BETA.186 BETA.191 BETA.192 C1.2 C2.2 C3.2 C4.2 C5.2 C6.2 C7.2 C8.2 C9.2 C10.2 C11.2 C12.2 C13.2 C14.2 C15.2 C16.2 C17.2 C18.2 C19.2 C20.2 C21.2 C22.2 C23.2 C24.2 C25.2 C26.2 C27.2 C28.2 C29.2 C30.2 C31.2 C32.2 C33.2 C34.2 C35.2 C36.2 C37.2 C38.2 C39.2 C40.2 C41.2 C42.2 C43.2 C44.2 C45.2 C46.2 C47.2 C48.2 C49.2 C50.2 C51.2 C52.2 C53.2 C54.2 C55.2 C56.2 C57.2 C58.2 C59.2 C60.2 C61.2 C62.2 C63.2 C64.2 C65.2 C66.2 C67.2 C68.2 C69.2 C70.2 C71.2 C72.2 C73.2 C74.2 C75.2 C76.2 C77.2 C78.2 C79.2 C80.2 C81.2 C82.2 IC1.23 IC2.23 PB-NW.6 PB-NW.7 PB-NW.10 PB-NW.13 PB-NW.18 PB-SE.6 PB-SE.7 PB-SE.10 PB-SE.13 PB-SE.18 PWR-NW.5 PWR-NW.7 PWR-SE.5 PWR-SE.7 Q1.2 Q1.4 R1.1 R14.2 R15.2 R17.2 R18.2 R20.2 R21.2 R24.2 R26.2 R27.2 R28.2 R30.2 R31.2 R33.2 R34.2 R36.2 R37.2 R39.2 R40.2 R42.2 R44.2 R46.2 R48.2 R50.2 R52.2 R54.2 R56.2 R58.2 R60.2 R62.2 R65.2 R68.2 R71.2 R74.2 R77.2 R80.2 R83.2 R86.2 R89.2 R95.2 R98.2 U1.4 U1.9 U1.10 U1.11 U1.22 U1.23 U1.35 U1.36 U1.41 U1.47 U1.48 U2.2 U3.3 U4.1 U5.1 U6.4 U6.9 U7.4 U7.9 U8.4 U8.9 U9.4 U9.9 U10.1 U11.2 U12.2 U13.1 U14.2 U15.2 U16.17 U17.4 U17.9 U18.4 U18.9 U19.4 U19.9 U20.4 U20.9 U21.4 U21.9 U22.4 U22.9 U23.4 U23.9 U24.4 U24.9 U25.4 U25.9 U26.4 U26.9 U27.4 U27.9 U28.4 U28.9 U29.4 U29.9 U30.5 U30.EPAD U31.5 U31.EPAD U32.5 U32.EPAD U33.5 U33.EPAD U34.5 U34.EPAD U35.5 U35.EPAD U36.5 U36.EPAD U37.5 U37.EPAD U38.5 U38.EPAD U39.2 U40.2 U41.1 U42.5 U42.EPAD U43.5 U43.EPAD U44.6 U$4.1 U$4.1A U$4.5 U$4.5A USB.5 ZED.15 ZED.16 ZED.21 ZED.22 ZED.27 ZED.28 ZED.33 ZED.34 ZED.39 ZED.40 ZED.45 ZED.46 ZED.51 ZED.52 ZED.65 ZED.66 ZED.71 ZED.72 ZED.77 ZED.85 ZED.86 ZED.95 ZED.96 ZED.115 ZED.116 ZED.121 ZED.122 ZED.127 ZED.128 ZED.133 ZED.134 ZED.139 ZED.140 ZED.145 ZED.146 ZED.151 ZED.152 ZED.165 ZED.166 ZED.171 ZED.172 ZED.177 ZED.185 ZED.186 ZED.191 ZED.192
GPA0_C: IC1.15 U9.5
GPA0_W: IC2.15 U25.5
GPA1_C: IC1.16 U9.3
GPA1_W: IC2.16 U25.3
GPA2_C: IC1.17 U8.5
GPA2_W: IC2.17 U24.5
GPA3_C: IC1.18 U8.3
GPA3_W: IC2.18 U24.3
GPA4_C: IC1.19 U7.5
GPA4_W: IC2.19 U23.5
GPA5_C: IC1.20 U7.3
GPA5_W: IC2.20 U23.3
GPA6_C: IC1.21 U6.5
GPA6_W: IC2.21 U22.5
GPA7_C: IC1.22 U6.3
GPA7_W: IC2.22 U22.3
GPB0_C: IC1.24 U20.5
GPB0_W: IC2.24 U21.5
GPB1_C: IC1.1 U20.3
GPB1_W: IC2.1 U21.3
GPB2_C: IC1.2 U19.5
GPB2_W: IC2.2
GPB3_C: IC1.3 U19.3
GPB3_W: IC2.3
GPB4_C: IC1.4 U18.5
GPB4_W: IC2.4
GPB5_C: IC1.5 U18.3
GPB5_W: IC2.5
GPB6_C: IC1.6 U17.5
GPB6_W: IC2.6
GPB7_C: IC1.7 U17.3
GPB7_W: IC2.7
JTAG_V: C29.1 PWR-SW.2 U12.6
JX1_00_N [LVDS]: BETA.13 ZED.13
JX1_00_P [LVDS]: BETA.11 ZED.11
JX1_01_N [LVDS]: BETA.14 ZED.14
JX1_01_P [LVDS]: BETA.12 ZED.12
JX1_02_N [LVDS]: BETA.19 ZED.19
JX1_02_P [LVDS]: BETA.17 ZED.17
JX1_03_N [LVDS]: BETA.20 ZED.20
JX1_03_P [LVDS]: BETA.18 ZED.18
JX1_04_N [LVDS]: BETA.25 ZED.25
JX1_04_P [LVDS]: BETA.23 ZED.23
JX1_05_N: BETA.26 ZED.26
JX1_05_P: BETA.24 ZED.24
JX1_06_N [LVDS]: BETA.31 ZED.31
JX1_06_P [LVDS]: BETA.29 ZED.29
JX1_07_N [LVDS]: BETA.32 ZED.32
JX1_07_P [LVDS]: BETA.30 ZED.30
JX1_08_N: BETA.37 ZED.37
JX1_08_P: BETA.35 ZED.35
JX1_09_N [LVDS]: BETA.38 ZED.38
JX1_09_P [LVDS]: BETA.36 ZED.36
JX1_10_N [LVDS]: BETA.43 ZED.43
JX1_10_P [LVDS]: BETA.41 ZED.41
JX1_11_N [LVDS]: BETA.44 ZED.44
JX1_11_P [LVDS]: BETA.42 ZED.42
JX1_12_N [LVDS]: BETA.49 ZED.49
JX1_12_P [LVDS]: BETA.47 ZED.47
JX1_13_N [LVDS]: BETA.50 ZED.50
JX1_13_P [LVDS]: BETA.48 ZED.48
JX1_14_N [LVDS]: BETA.55 ZED.55
JX1_14_P [LVDS]: BETA.53 ZED.53
JX1_15_N: BETA.56 ZED.56
JX1_15_P: BETA.54 ZED.54
JX1_16_N [LVDS]: BETA.63 ZED.63
JX1_16_P [LVDS]: BETA.61 ZED.61
JX1_17_N [LVDS]: BETA.64 ZED.64
JX1_17_P [LVDS]: BETA.62 ZED.62
JX1_18_N [LVDS]: BETA.69 ZED.69
JX1_18_P [LVDS]: BETA.67 ZED.67
JX1_19_N [LVDS]: BETA.70 ZED.70
JX1_19_P [LVDS]: BETA.68 ZED.68
JX1_20_N: BETA.75 ZED.75
JX1_20_P: BETA.73 ZED.73
JX1_21_N: BETA.76 ZED.76
JX1_21_P: BETA.74 ZED.74
JX1_22_N: BETA.83 ZED.83
JX1_22_P: BETA.81 ZED.81
JX1_23_N [LVDS]: BETA.84 ZED.84
JX1_23_P [LVDS]: BETA.82 ZED.82
JX2_00_N [LVDS]: BETA.119 ZED.119
JX2_00_P [LVDS]: BETA.117 ZED.117
JX2_01_N [LVDS]: BETA.120 ZED.120
JX2_01_P [LVDS]: BETA.118 ZED.118
JX2_02_N [LVDS]: BETA.125 ZED.125
JX2_02_P [LVDS]: BETA.123 ZED.123
JX2_03_N [LVDS]: BETA.126 ZED.126
JX2_03_P [LVDS]: BETA.124 ZED.124
JX2_04_N [LVDS]: BETA.131 ZED.131
JX2_04_P [LVDS]: BETA.129 ZED.129
JX2_05_N [LVDS]: BETA.132 ZED.132
JX2_05_P [LVDS]: BETA.130 ZED.130
JX2_06_N [LVDS]: BETA.137 ZED.137
JX2_06_P [LVDS]: BETA.135 ZED.135
JX2_07_N [LVDS]: BETA.138 ZED.138
JX2_07_P [LVDS]: BETA.136 ZED.136
JX2_08_N [LVDS]: BETA.143 ZED.143
JX2_08_P [LVDS]: BETA.141 ZED.141
JX2_09_N [LVDS]: BETA.144 ZED.144
JX2_09_P [LVDS]: BETA.142 ZED.142
JX2_10_N [LVDS]: BETA.149 ZED.149
JX2_10_P [LVDS]: BETA.147 ZED.147
JX2_11_N [LVDS]: BETA.150 ZED.150
JX2_11_P [LVDS]: BETA.148 ZED.148
JX2_12_N [LVDS]: BETA.155 ZED.155
JX2_12_P [LVDS]: BETA.153 ZED.153
JX2_13_N [LVDS]: BETA.156 ZED.156
JX2_13_P [LVDS]: BETA.154 ZED.154
JX2_14_N: BETA.163 ZED.163
JX2_14_P: BETA.161 ZED.161
JX2_15_N [LVDS]: BETA.164 ZED.164
JX2_15_P [LVDS]: BETA.162 ZED.162
JX2_16_N [LVDS]: BETA.169 ZED.169
JX2_16_P [LVDS]: BETA.167 ZED.167
JX2_17_N [LVDS]: BETA.170 ZED.170
JX2_17_P [LVDS]: BETA.168 ZED.168
JX2_18_N [LVDS]: BETA.175 ZED.175
JX2_18_P [LVDS]: BETA.173 ZED.173
JX2_19_N [LVDS]: BETA.176 ZED.176
JX2_19_P [LVDS]: BETA.174 ZED.174
JX2_20_N [LVDS]: BETA.183 ZED.183
JX2_20_P [LVDS]: BETA.181 ZED.181
JX2_21_N [LVDS]: BETA.184 ZED.184
JX2_21_P [LVDS]: BETA.182 ZED.182
JX2_22_N: BETA.189 ZED.189
JX2_22_P: BETA.187 ZED.187
JX2_23_N [LVDS]: BETA.190 ZED.190
JX2_23_P [LVDS]: BETA.188 ZED.188
JX2_SE_0: U41.4 ZED.113
JX2_SE_1: U41.3 ZED.114
M_V_NW: C77.1 PWR-NW.2 R7.1 R8.1 R11.1 U39.5
M_V_SE: C80.1 PWR-SE.2 R9.1 R10.1 R12.1 U40.5
MP-NE-2: BETA.7
MP-NW-1: PWR-NW.3 R64.2 U30.4
MP-NW-2: PWR-NW.1 R63.2 U30.2
MP-SE-1: PWR-SE.1 R66.2 U31.2
MP-SE-2: BETA.112
MP-SE-3: PWR-SE.3 R67.2 U31.4
MT: U$1.MT1 U$1.MT2
N$1: C49.1 L9.1 R41.1 U21.8
N$10: R77.1 U34.6
N$32: C11.1 R11.2 U4.7 U4.8
N$33: C12.1 R12.2 U5.7 U5.8
N$34: C13.1 L1.1 R13.1 TR1.1 U6.8
N$38: R95.1 U42.6
N$39: R13.2 R14.1 TR1.2 U6.7
N$41: R15.1 TR1.3
N$46: R41.2 R42.1 U21.7
N$47: C50.1 U21.6
N$48: C64.1 L14.1 R55.1 U26.8
N$49: R55.2 R56.1 U26.7
N$50: ZED.97
N$51: ZED.99
N$52: ZED.98
N$53: ZED.100
N$76: R98.1 U43.6
N$88: C14.1 U6.6
N$97: C65.1 U26.6
N$98: C67.1 L15.1 R57.1 U27.8
N$99: U30.9
N$177: R5.1 R6.1 U2.1
N$178: C1.1 Q1.1 U1.1
N$179: C2.1 Q1.3 U1.2
N$180: C3.1 R2.1 U1.34
N$181: R1.2 U1.5
N$182: U3.4 USB.4
N$233: BETA.198
N$244: R23.2 R24.1 U13.6
N$250: R25.2 R26.1 U10.6
N$416: C16.1 L2.1 R16.1 TR2.1 U7.8
N$417: R16.2 R17.1 TR2.2 U7.7
N$418: R18.1 TR2.3
N$419: C17.1 U7.6
N$420: R57.2 R58.1 U27.7
N$421: C68.1 U27.6
N$422: U30.8
N$423: R80.1 U35.6
N$608: C19.1 L3.1 R19.1 TR3.1 U8.8
N$609: R19.2 R20.1 TR3.2 U8.7
N$610: R21.1 TR3.3
N$611: C20.1 U8.6
N$612: C70.1 L16.1 R59.1 U28.8
N$613: R59.2 R60.1 U28.7
N$614: U31.9
N$615: R83.1 U36.6
N$800: C22.1 L4.1 R22.1 TR4.1 U9.8
N$801: R22.2 R27.1 TR4.2 U9.7
N$802: R28.1 TR4.3
N$803: C23.1 U9.6
N$804: C71.1 U28.6
N$805: C73.1 L17.1 R61.1 U29.8
N$806: U31.8
N$807: R86.1 U37.6
N$992: C37.1 L5.1 R29.1 TR5.1 U17.8
N$993: R29.2 R30.1 TR5.2 U17.7
N$994: R31.1 TR5.3
N$995: C38.1 U17.6
N$996: R61.2 R62.1 U29.7
N$997: C74.1 U29.6
N$999: R65.1 U30.6
N$1000: C40.1 L6.1 R32.1 TR6.1 U18.8
N$1001: R32.2 R33.1 TR6.2 U18.7
N$1002: R34.1 TR6.3
N$1003: C41.1 U18.6
N$1006: C82.1 R92.2 U41.7 U41.8
N$1008: C43.1 L7.1 R35.1 TR7.1 U19.8
N$1009: R35.2 R36.1 TR7.2 U19.7
N$1010: R37.1 TR7.3
N$1011: C44.1 U19.6
N$1015: R68.1 U31.6
N$1016: C46.1 L8.1 R38.1 TR8.1 U20.8
N$1017: R38.2 R39.1 TR8.2 U20.7
N$1018: R40.1 TR8.3
N$1019: C47.1 U20.6
N$1023: R71.1 U32.6
N$1945: R74.1 U33.6
N$3234: C52.1 L10.1 R43.1 U22.8
N$3235: R43.2 R44.1 U22.7
N$3236: C53.1 U22.6
N$3240: R89.1 U38.6
N$3425: C55.1 L11.1 R45.1 U23.8
N$3426: R45.2 R46.1 U23.7
N$3427: C56.1 U23.6
N$3616: C58.1 L12.1 R47.1 U24.8
N$3617: R47.2 R48.1 U24.7
N$3618: C59.1 U24.6
N$3622: C76.1 U39.4
N$3807: C61.1 L13.1 R49.1 U25.8
N$3808: R49.2 R50.1 U25.7
N$3809: C62.1 U25.6
N$4020: IC1.11 R51.2 R52.1
N$4041: IC2.11 R53.2 R54.1
N$7859: C79.1 U40.4
N_CHK_V: PB-SE.20
N_I2C_V: C32.1 PWR-NE.1 U14.6
N_SPI_V: C31.1 PWR-NE.3 U14.1
N_VE: PWR-NE.5 R79.2 U35.4
N_VE_CV: PB-SE.12
N_VE_OV: PB-SE.1
N_VE_UV: PB-SE.15
N_VN: PWR-NE.7 R78.2 U35.2
N_VN_CV: PB-SE.14
N_VN_OV: PB-SE.3
N_VN_UV: PB-SE.17
N_VW: PWR-NW.8 R76.2 U34.4
N_VW_CV: PB-SE.16
N_VW_OV: PB-SE.5
N_VW_UV: PB-SE.19
PCIE_N_V: BETA.78 BETA.79 BETA.80 R70.2 U32.4
PCIE_S_V: BETA.178 BETA.179 BETA.180 R73.2 U33.4
PMOD_D0: U16.9 ZED.101
PMOD_D1: U16.10 ZED.102
PMOD_D2: U16.12 ZED.103
PMOD_D3: U16.11 ZED.104
PMOD_D6: U16.14 ZED.107
PMOD_D7: U16.13 ZED.108
PMOD_SCL: U44.1 ZED.105
PMOD_SDA: U44.2 ZED.106
S_CHK_V: PB-NW.20
S_I2C_V: C26.1 PWR-SW.1 U11.6
S_SPI_V: C25.1 PWR-SW.3 U11.1
S_VE: PWR-SE.8 R82.2 U36.4
S_VE_CV: PB-NW.16
S_VE_OV: PB-NW.5
S_VE_UV: PB-NW.19
S_VS: PWR-SW.7 R84.2 U37.2
S_VS_CV: PB-NW.14
S_VS_OV: PB-NW.3
S_VS_UV: PB-NW.17
S_VW: PWR-SW.5 R85.2 U37.4
S_VW_CV: PB-NW.12
S_VW_OV: PB-NW.1
S_VW_UV: PB-NW.15
SCL: IC1.9 IC2.9 R90.2 U10.4 U13.4 U32.9 U33.9 U34.9 U35.9 U36.9 U37.9 U38.9 U41.6 U42.9 U43.9
SDA: IC1.10 IC2.10 R91.2 U10.5 U13.5 U32.8 U33.8 U34.8 U35.8 U36.8 U37.8 U38.8 U41.5 U42.8 U43.8
U6_V: L1.2 R75.1 U34.1
U7_V: L2.2 R76.1 U34.3
U8_V: L3.2 R78.1 U35.1
U9_V: L4.2 R79.1 U35.3
U17_V: L5.2 R81.1 U36.1
U18_V: L6.2 R82.1 U36.3
U19_V: L7.2 R84.1 U37.1
U20_V: L8.2 R85.1 U37.3
U21_V: L9.2 R73.1 U33.3
U22_V: L10.2 R72.1 U33.1
U24_V: L12.2 R69.1 U32.1
U25_V: L13.2 R70.1 U32.3
U26_PWRGD: U13.11 U26.5
U26_SHDN: U13.12 U26.3
U26_V: L14.2 R66.1 U31.1
U27_PWRGD: U13.9 U27.5
U27_SHDN: U13.10 U27.3
U27_V: L15.2 R67.1 U31.3
U28_PWRGD: U10.11 U28.5
U28_SHDN: U10.12 U28.3
U28_V: L16.2 R63.1 U30.1
U29_PWRGD: U10.9 U29.5
U29_SHDN: U10.10 U29.3
U29_V: L17.2 R64.1 U30.3
U39_EN: U39.3
U40_EN: U40.3
U43_SENSE2-: R97.2 U43.4
VBAT: ZED.7
VBUS: C4.1 FB1.1 U3.5 USB.1
VCC: IC1.8 IC1.12 IC2.8 IC2.12 R23.1 R25.1 R51.1 R53.1 R90.1 R91.1 R92.1 U10.3 U10.7 U13.3 U13.7 U30.10 U31.10 U32.10 U33.10 U34.10 U35.10 U36.10 U37.10 U38.10 U42.10 U43.10
VCCA: C6.1 U1.37
VCCD: FB2.1 FB3.1 R2.2 R3.2 R4.2 R5.2 U1.12 U1.24 U1.39 U1.46 U2.6
VCCIO: L11.2 R93.1 R94.1 R96.1 R97.1 U4.2 U5.2 U41.2 U42.1 U42.3 U43.1 U43.3
VCCO_13 [LVDS]: R94.2 U42.4 ZED.198
VCCO_34: R96.2 U43.2 ZED.78 ZED.79 ZED.80
VCCO_35: R93.2 U42.2 ZED.178 ZED.179 ZED.180
VCORE: C5.1 U1.38
VDD: U44.3
VIN: U$4.3 U$4.3A
VIN_HDR_N: BETA.57 BETA.58 BETA.59 BETA.60 R69.2 U32.2
VIN_HDR_S: BETA.157 BETA.158 BETA.159 BETA.160 R72.2 U33.2
VPHY: C7.1 C8.1 FB2.2 U1.3
VPLL: C9.1 C10.1 FB3.2 U1.8
VREGIN: FB1.2 U1.40
W_I2C_V: C28.1 PWR-SW.4 U12.1
W_VW: PWR-NW.4 PWR-NW.6 R75.2 U34.2
W_VW_CV: PB-SE.8
W_VW_OV: PB-SE.9
W_VW_UV: PB-SE.11
ZED_5V: R87.1 U38.1 U$4.2 U$4.2A
ZED_5V': R87.2 U38.2 ZED.57 ZED.58 ZED.59 ZED.60 ZED.112 ZED.157 ZED.158 ZED.159 ZED.160
ZED_TDI: JP1.1 ZED.4

## Tracks (layer width: path | path; a pad name or v marks a point on that pad's centre or on a via)
A_SCL  (via drill 0.25 pad 0.25)
  Top 0.203: PB-NW.2 21.91,44.16 v21.91,41.27 | v24.76,37.15 24.29,37.15 U4.5
  Bottom 0.203: v21.91,41.27 25.4,41.27 25.4,37.15 v24.76,37.15 24.45,37.15 R8.2
A_SCL'  (via drill 0.25 pad 0.25)
  Top 0.203: v24.29,31.75 U4.4
  Bottom 0.203: U44.8 64.44,30.81 62.86,32.38 46.99,32.38 41.66,27.05 26.29,27.05 24.29,29.04 v24.29,31.75
A_SDA  (via drill 0.25 pad 0.25)
  Top 0.203: PB-NW.4 22.54,43.66 v22.54,40 | v24.13,37.78 23.74,37.78 U4.6
  Bottom 0.203: v22.54,40 24.76,40 24.76,37.78 v24.13,37.78 23.49,37.78 R7.2
A_SDA'  (via drill 0.25 pad 0.25)
  Top 0.203: v23.74,32.38 U4.3
  Bottom 0.203: U44.7 64.31,30.18 62.61,31.88 47.24,31.88 41.91,26.54 26.03,26.54 23.74,28.83 v23.74,32.38
AB_SCL
  Bottom 0.203: ZED.10 67.2,45.72 75.18,45.72
AB_SDA  (via drill 0.25 pad 0.25)
  Route15 0.203: v67.2,54.61 67.2,45.4 v75.73,45.4
  Bottom 0.203: ZED.9 v67.2,54.61
B_SCL  (via drill 0.25 pad 0.25)
  Top 0.203: PB-SE.2 79.69,12.99 v79.69,15.88 | v76.83,20 77.3,20 U5.5
  Bottom 0.203: v79.69,15.88 76.2,15.88 76.2,20 v76.83,20 77.15,20 R10.2
B_SCL'  (via drill 0.25 pad 0.25)
  Top 0.203: v77.3,25.4 U5.4
  Bottom 0.203: U44.5 70.81,28.88 72.39,27.3 75.88,27.3 77.3,25.88 v77.3,25.4
B_SDA  (via drill 0.25 pad 0.25)
  Top 0.203: PB-SE.4 79.06,13.49 v79.06,17.14 | v77.47,19.37 77.85,19.37 U5.6
  Bottom 0.203: v79.06,17.14 76.83,17.14 76.83,19.37 v77.47,19.37 78.1,19.37 R9.2
B_SDA'  (via drill 0.25 pad 0.25)
  Top 0.203: v77.85,24.77 U5.3
  Bottom 0.203: U44.4 74.94,28.88 77.85,25.97 v77.85,24.77
BANK13_00_N  (via drill 0.25)
  Top 0.152: BETA.87 v36,51.44
  Bottom 0.152: ZED.87 v36,51.44
BANK13_00_P  (via drill 0.25)
  Top 0.152: BETA.89 v35.2,51.44
  Bottom 0.152: ZED.89 v35.2,51.44
BANK13_01_N  (via drill 0.25)
  Top 0.152: BETA.90 v35.2,50.16
  Bottom 0.152: ZED.90 v35.2,50.16
BANK13_01_P  (via drill 0.25)
  Top 0.152: BETA.88 v36,50.16
  Bottom 0.152: ZED.88 v36,50.16
BANK13_02_N  (via drill 0.25)
  Top 0.152: BETA.91 v34.4,51.44
  Bottom 0.152: ZED.91 v34.4,51.44
BANK13_02_P  (via drill 0.25)
  Top 0.152: BETA.93 v33.6,51.44
  Bottom 0.152: ZED.93 v33.6,51.44
BANK13_03_N  (via drill 0.25)
  Top 0.152: BETA.92 v34.4,50.16
  Bottom 0.152: ZED.92 v34.4,50.16
BANK13_03_P  (via drill 0.25)
  Top 0.152: BETA.94 v33.6,50.16
  Bottom 0.152: ZED.94 v33.6,50.16
BANK13_04_N  (via drill 0.25)
  Top 0.152: BETA.193 v33.6,6.98
  Bottom 0.152: ZED.193 v33.6,6.98
BANK13_04_P  (via drill 0.25)
  Top 0.152: BETA.195 v32.8,6.98
  Bottom 0.152: ZED.195 v32.8,6.98
BANK13_05_N  (via drill 0.25)
  Top 0.127: BETA.196 v32.8,5.71
  Bottom 0.127: ZED.196 v32.8,5.71
BANK13_05_P  (via drill 0.25)
  Top 0.127: BETA.194 v33.6,5.71
  Bottom 0.127: ZED.194 v33.6,5.71
BANK13_06_N  (via drill 0.25)
  Top 0.152: BETA.199 v31.2,6.98
  Bottom 0.152: ZED.199 v31.2,6.98
BANK13_06_P  (via drill 0.25)
  Top 0.152: BETA.197 v32,6.98
  Bottom 0.152: ZED.197 v32,6.98
BANK13_SE_0  (1 unrouted)
BETA_5V  (via drill 0.25 pad 0.25)
  Top 0.152: 91.67,27.07 91.27,26.67 v90.81,26.67
  Top 0.813: U$4.4A U$4.4 91.67,27.07 R88.1
  Bottom 0.152: U38.3 91.44,28.57 91.44,27.3 v90.81,26.67
BETA_5V'  (via drill 0.25 pad 0.25, 0.3 pad 0.25, 0.41 pad 0.25)
  Top 0.152: R88.2 88.99,26.67 v89.53,26.67
  Top 0.305: U6.2 41.15,38.43 arc-90 40.89,38.68 40.89,38.75 40.89,38.81 arc-90 41.15,39.06 U6.1 | U17.2 60.45,18.72 arc-90 60.71,18.47 60.71,18.4 60.71,18.34 arc-90 60.45,18.09 U17.1 | U7.2 50.67,38.43 arc-90 50.42,38.68 50.42,38.75 50.42,38.81 arc-90 50.67,39.06 U7.1 | U18.2 50.93,18.72 arc-90 51.18,18.47 51.18,18.4 51.18,18.34 arc-90 50.93,18.09 U18.1 | U8.2 60.2,38.43 arc-90 59.94,38.68 59.94,38.75 59.94,38.81 arc-90 60.2,39.06 U8.1 | U19.2 41.4,18.72 arc-90 41.66,18.47 41.66,18.4 41.66,18.34 arc-90 41.4,18.09 U19.1 | U9.2 69.72,38.43 arc-90 69.47,38.68 69.47,38.75 69.47,38.81 arc-90 69.72,39.06 U9.1 | U20.2 31.88,18.72 arc-90 32.13,18.47 32.13,18.4 32.13,18.34 arc-90 31.88,18.09 U20.1 | U23.1 6.02,26.54 arc90 6.27,26.29 6.34,26.29 6.4,26.29 arc90 6.65,26.54 U23.2 | U25.1 6.02,41.78 arc90 6.27,41.53 6.34,41.53 6.4,41.53 arc90 6.65,41.78 U25.2 | U26.2 68.28,26.16 arc-90 68.53,26.42 68.59,26.42 68.66,26.42 arc-90 68.91,26.16 U26.1 | U27.1 68.91,18.54 arc90 68.66,18.8 68.59,18.8 68.53,18.8 arc90 68.28,18.54 U27.2 | U29.1 32.69,38.61 arc90 32.94,38.35 33.01,38.35 33.07,38.35 arc90 33.32,38.61 U29.2 | U28.2 33.32,30.99 arc-90 33.07,30.73 33.01,30.73 32.94,30.73 arc-90 32.69,30.99 U28.1 | U14.5 v84.2,37.47 | U15.5 v84.2,41.91 | U11.5 v17.4,19.68 | U12.5 v17.4,15.24 | U24.1 6.02,34.16 arc90 6.27,33.91 6.34,33.91 6.4,33.91 arc90 6.65,34.16 U24.2 | U22.1 6.02,18.92 arc90 6.27,18.67 6.34,18.67 6.4,18.67 arc90 6.65,18.92 U22.2 | U21.1 6.02,11.3 arc90 6.27,11.05 6.34,11.05 6.4,11.05 arc90 6.65,11.3 U21.2
  Top 0.457: C66.1 v65.41,26.04 v65.41,26.67 | C69.1 v65.41,18.41 v65.41,19.05 | C72.1 v36.19,31.11 v36.19,30.48
  Top 0.508: C15.1 v41.27,35.56 v40.64,35.56 40.26,35.56 arc-90 40,35.81 40,38.49 arc-90 40.26,38.75 40.89,38.75 | C39.1 v60.32,21.59 v60.96,21.59 61.34,21.59 arc-90 61.59,21.34 61.59,18.66 arc-90 61.34,18.4 60.71,18.4 | C18.1 v50.8,35.56 v50.16,35.56 49.78,35.56 arc-90 49.53,35.81 49.53,38.49 arc-90 49.78,38.75 50.42,38.75 | C42.1 v50.8,21.59 v51.43,21.59 51.82,21.59 arc-90 52.07,21.34 52.07,18.66 arc-90 51.82,18.4 51.18,18.4 | C21.1 v60.32,35.56 v59.69,35.56 59.31,35.56 arc-90 59.05,35.81 59.05,38.49 arc-90 59.31,38.75 59.94,38.75 | C45.1 v41.27,21.59 v41.91,21.59 42.29,21.59 arc-90 42.54,21.34 42.54,18.66 arc-90 42.29,18.4 41.66,18.4 | C24.1 v69.85,35.56 v69.22,35.56 68.83,35.56 arc-90 68.58,35.81 68.58,38.49 arc-90 68.83,38.75 69.47,38.75 | C48.1 v31.75,21.59 v32.38,21.59 32.77,21.59 arc-90 33.02,21.34 33.02,18.66 arc-90 32.77,18.4 32.13,18.4 | C57.1 v9.52,26.67 v9.52,26.04 9.52,25.65 arc-90 9.27,25.4 6.59,25.4 arc-90 6.34,25.65 6.34,26.29 | C63.1 v9.52,41.91 v9.52,41.27 9.52,40.89 arc-90 9.27,40.64 6.59,40.64 arc-90 6.34,40.89 6.34,41.53 | v65.41,26.67 65.41,27.05 arc-90 65.66,27.3 68.34,27.3 arc-90 68.59,27.05 68.59,26.42 | v65.41,19.05 65.41,19.43 arc-90 65.66,19.68 68.34,19.68 arc-90 68.59,19.43 68.59,18.8 | C75.1 v36.19,38.73 v36.19,38.1 36.19,37.72 arc-90 35.94,37.47 33.26,37.47 arc-90 33.01,37.72 33.01,38.35 | v36.19,30.48 36.19,30.1 arc-90 35.94,29.84 33.26,29.84 arc-90 33.01,30.1 33.01,30.73 | C60.1 v9.52,34.29 v9.52,33.66 9.52,33.27 arc-90 9.27,33.02 6.59,33.02 arc-90 6.34,33.27 6.34,33.91 | C54.1 v9.52,19.05 v9.52,18.41 9.52,18.03 arc-90 9.27,17.78 6.59,17.78 arc-90 6.34,18.03 6.34,18.67
  Top 0.508: C51.1 v9.52,11.43 v9.52,10.79 9.52,10.41 arc-90 9.27,10.16 6.59,10.16 arc-90 6.34,10.41 6.34,11.05
  Top 0.813: R88.2 v88.67,23.49
  Bottom 0.152: U39.1 18.4,38.1 C78.1 | U40.1 83.2,19.05 C81.1 | U38.4 90.81,28.07 90.81,27.3 90.17,26.67 v89.53,26.67
  Bottom 0.203: C78.1 18.41,38.07 v18.41,36.51 | C81.1 83.19,19.08 v83.19,20.64
  Bottom 0.406: C27.1 17.78,20.95 17.4,20.57 v17.4,19.68 | C30.1 17.78,16.51 17.4,16.13 v17.4,15.24 | C33.1 83.82,36.2 84.2,36.58 v84.2,37.47 | C36.1 83.82,40.64 84.2,41.02 v84.2,41.91
  other vias: 88.67,25.4 88.67,24.45
  pour Route2: 8.25,43.81 11.43,43.81 11.43,37.47 19.05,37.47 19.05,34.29 11.43,34.29 11.43,20.95 30.48,20.95 30.48,22.86 63.5,22.86 63.5,27.3 69.85,27.3 69.85,22.23 80.01,22.23 80.01,34.29 38.1,34.29 38.1,29.84 31.75,29.84 31.75,40 78.1,40 78.1,43.81 85.09,43.81 85.09,26.04 90.17,26.04 90.17,16.51 64.13,16.51 64.13,17.78 22.22,17.78 22.22,13.97 11.43,13.97 11.43,8.89 8.25,8.89
BETA_TDO  (via drill 0.25)
  Top 0.203: BETA.3 v69.6,54.61
  Route15 0.203: JP1.2 89.81,54.29 88.66,55.44 70.42,55.44 v69.6,54.61
CD  (via drill 0.25)  (1 unrouted)
  Top 0.203: U$1.CD1 v89.41,9.62
  Bottom 0.203: v89.41,9.62 U16.1
CLK  (via drill 0.25)
  Top 0.203: U$1.5 v94.61,12.22
  Bottom 0.203: v94.61,12.22 92.3,12.22 91.41,11.33 U16.6
CMD  (via drill 0.25)
  Top 0.203: U$1.3 v94.61,14.42
  Bottom 0.203: v94.61,14.42 92.15,14.42 91.01,13.28 U16.5
DAT0  (via drill 0.25)
  Top 0.203: U$1.7 v94.61,10.02
  Bottom 0.203: v94.61,10.02 92.43,10.02 91.8,9.38 U16.7
DAT1  (via drill 0.25)
  Top 0.203: U$1.8 v94.61,8.92
  Bottom 0.203: v94.61,8.92 92.58,8.92 92.2,8.54 U16.8
DAT2  (via drill 0.25)
  Top 0.203: U$1.1 v94.61,16.62
  Bottom 0.203: v94.61,16.62 91.85,16.62 90.19,14.97 U16.3
DAT3  (via drill 0.25)
  Top 0.203: U$1.2 v94.61,15.52
  Bottom 0.203: v94.61,15.52 92,15.52 90.6,14.12 U16.4
E_I2C_V  (via drill 0.25 pad 0.25)
  Top 0.305: U15.1 81.66,42.86 81.66,53.96 arc90 81.65,53.97 PWR-NE.4
  Top 0.406: U15.1 v79.63,42.86
  Bottom 0.406: v79.63,42.86 79.81,42.68 C34.1
E_SDI_V  (via drill 0.25 pad 0.25)
  Top 0.305: U15.6 82.17,42.86 82.17,53.97 arc-90 82.17,53.97 PWR-NE.2
  Top 0.406: U15.6 v84.2,42.86
  Bottom 0.406: v84.2,42.86 84.02,42.68 C35.1
E_VE  (via drill 0.25 pad 0.25)
  Top 0.152: R81.2 v61.59,12.7
  Top 0.61: PWR-SE.4 PWR-SE.6 77.47,9.52 arc-90 76.83,10.16 76.83,11.43 arc90 76.2,12.06 64.29,12.06 arc-45 64.02,12.18 63.61,12.59 arc45 63.34,12.7 R81.2
  Bottom 0.152: U36.2 55.11,12.38 60.01,12.38 60.32,12.06 60.96,12.06 v61.59,12.7
EE_CLK1
  Bottom 0.152: R4.1 100.08,43.23 U2.4 100.13,44.45 96.65,44.45 96.53,44.34 U1.44
EE_CS1
  Bottom 0.152: U1.45 96.67,43.84 96.9,44.07 99.19,44.07 U2.5 R3.1
EE_DATA1
  Bottom 0.152: R6.2 99.76,46.92 100.13,46.56 U2.3 100.13,44.83 96.27,44.83 96.26,44.84 U1.43
EN1
  Top 0.152: U11.4 18.92,20.63 U10.13
EN1B
  Top 0.152: U14.4 82.68,36.52 U13.13
EN2
  Top 0.152: U12.4 19.43,16.19 U10.14
EN2B
  Top 0.152: U15.4 82.17,40.96 U13.14
EN3
  Top 0.152: U11.3 20.45,20.63 U10.16
EN3B
  Top 0.152: U14.3 81.15,36.52 U13.16
EN4
  Top 0.152: U12.3 19.94,16.19 U10.15
EN4B
  Top 0.152: U15.3 81.66,40.96 U13.15
FTDI_D_N  (via drill 0.25 pad 0.25)
  Top 0.152: USB.2 v92.71,43.8 92.57,43.94 U3.1
  Bottom 0.152: U1.6 91.31,43.04 arc-90 92.07,43.8 v92.71,43.8
FTDI_D_P  (via drill 0.25 pad 0.25)
  Top 0.152: USB.3 v92.71,44.45 U3.2
  Bottom 0.152: U1.7 90.81,43.18 arc-90 92.08,44.45 v92.71,44.45
FTDI_TCK  (via drill 0.25)
  Top 0.203: BETA.1 v70.4,51.44
  Route15 0.203: v70.4,51.44 70.4,53.91 71.03,54.55 86.81,54.55 87.44,53.91 87.44,42.46 87.57,42.34 v87.76,42.34
  Bottom 0.203: ZED.1 v70.4,51.44 | U1.13 v87.76,42.34
FTDI_TDI  (via drill 0.25)
  Top 0.203: BETA.4 v69.6,46.99
  Route15 0.203: v69.6,46.99 69.6,49.28 70.93,50.61 70.93,53.72 71.31,54.1 86.61,54.1 87,53.72 87,43.47 86.36,42.84 v85.85,42.84
  Bottom 0.203: v85.85,42.84 U1.14
FTDI_TDO  (via drill 0.25)
  Route15 0.203: v69.6,51.44 69.6,53.85 70.74,54.99 87,54.99 87.88,54.1 87.88,43.34 v88.01,43.34
  Bottom 0.203: ZED.3 v69.6,51.44 | U1.15 v88.01,43.34
FTDI_TMS  (via drill 0.25)
  Top 0.203: BETA.2 v70.4,46.99
  Route15 0.203: v85.85,43.84 86.17,43.84 86.55,44.22 86.55,53.53 86.42,53.66 71.56,53.66 71.37,53.47 71.37,50.42 70.4,49.45 v70.4,46.99
  Bottom 0.203: ZED.2 v70.4,46.99 | U1.16 v85.85,43.84
GND  (via drill 0.25, 0.25 pad 0.25, 0.3 pad 0.25, 0.33 pad 0.25, 0.38 pad 0.25, 0.41 pad 0.25)
  Top 0.152: USB.5 97.47,46.36 v97.16,46.36
  Top 0.203: U3.3 92.58,44.96 v92.71,45.09 | C82.2 58.87,27.77 U41.1 | C11.2 22.69,34.48 U4.1 | IC2.23 15.75,32.26 v15.88,32.38 | IC1.23 50.04,27.81 v50.16,27.94 | C12.2 78.91,22.67 U5.1
  Bottom 0.152: U2.2 99.19,46.61 97.16,46.61 v97.16,46.36
  Bottom 0.203: U44.6 70.79,29.52 71.44,30.16 v71.44,30.8 | U33.5 10.79,4.18 U33.EPAD | U32.5 10.79,52.97 U32.EPAD | U34.5 47.99,41.91 U34.EPAD | U35.5 67.04,41.91 U35.EPAD | U37.5 34.56,15.24 U37.EPAD | U36.5 53.61,15.24 U36.EPAD | U31.5 71.75,21.23 U31.EPAD | U38.5 88.27,27.57 U38.EPAD